# EAGLE board Daughter Card.job (EAGLE 6.5.1)
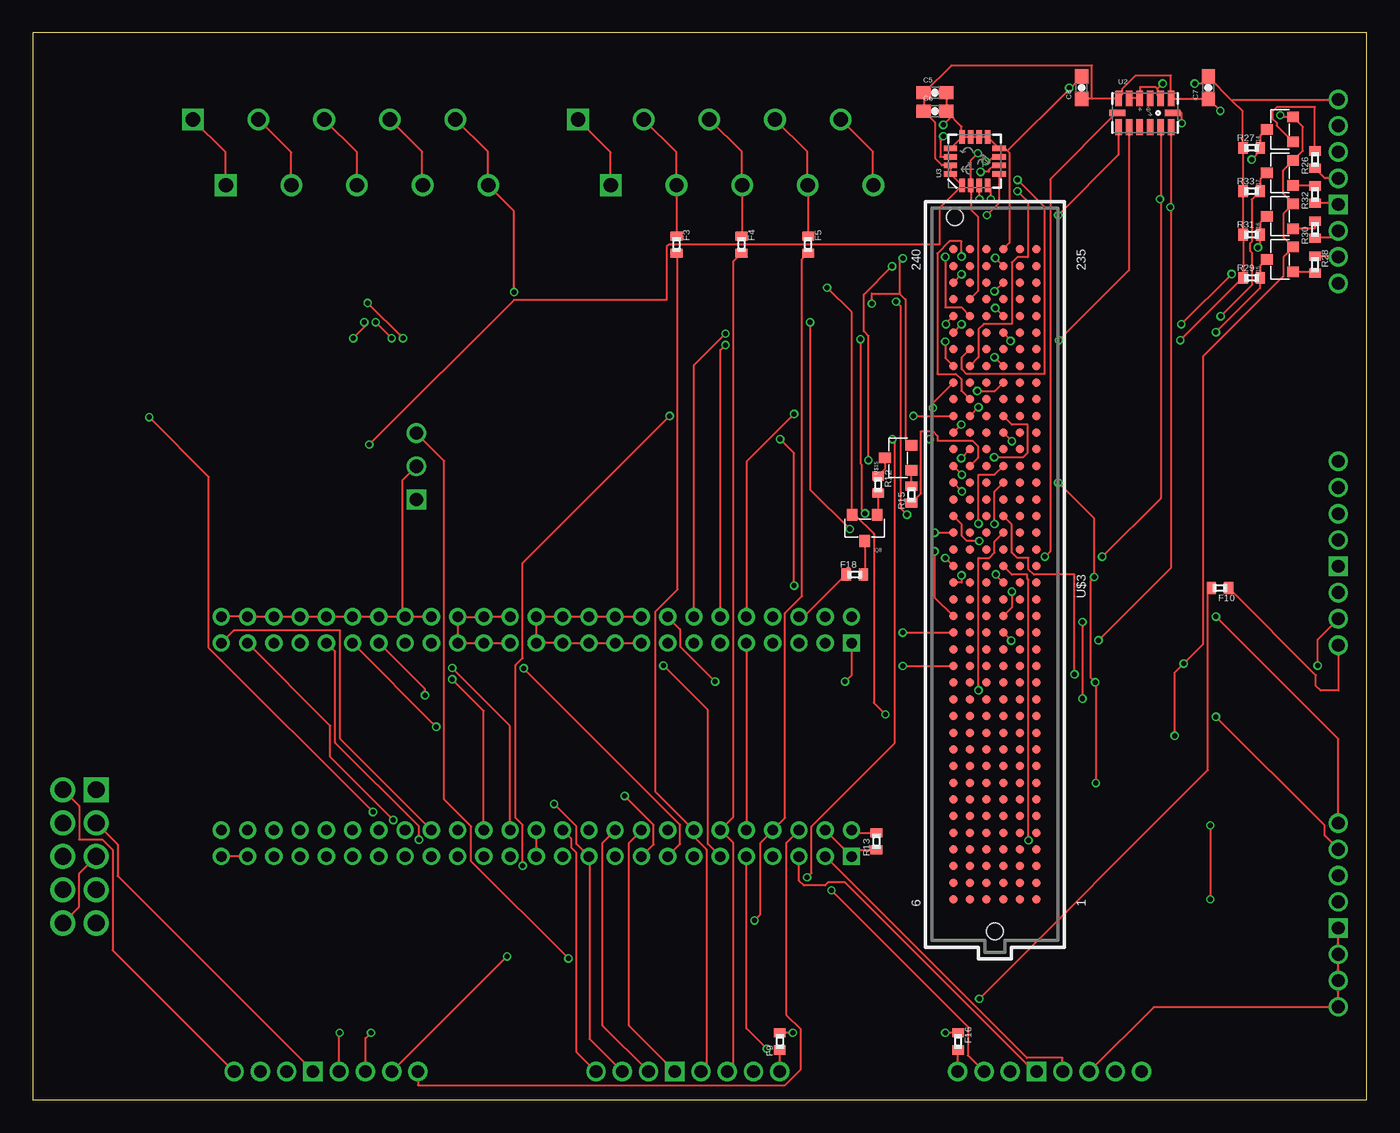
[diagram p0: board, top side]
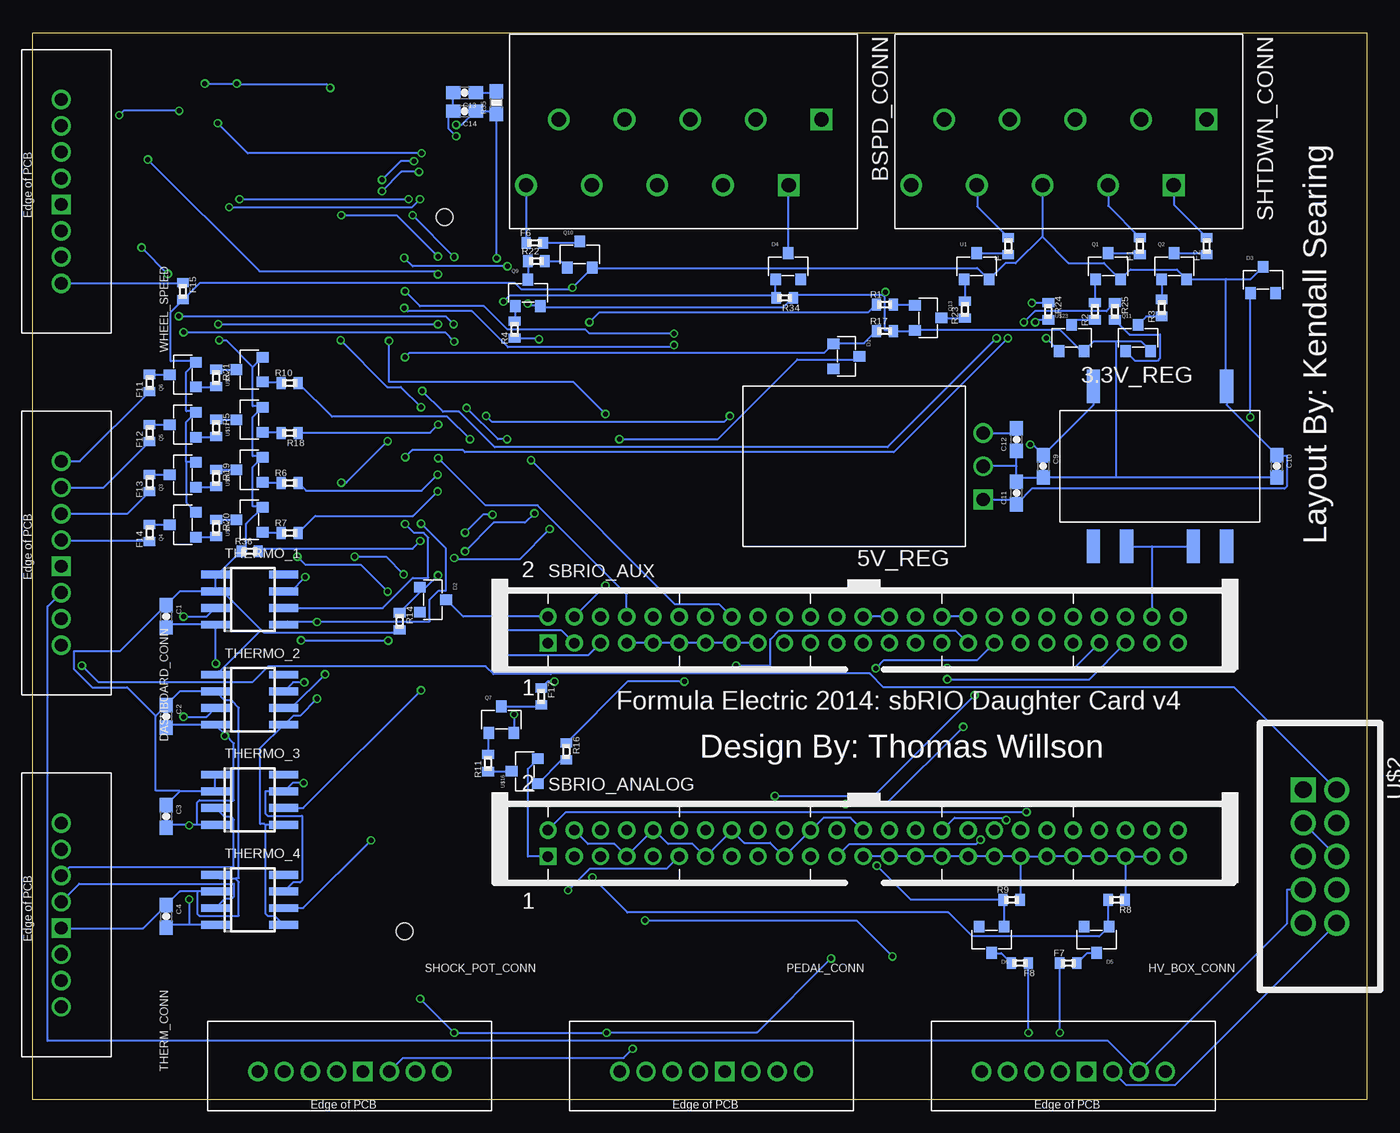
[diagram p1: board, bottom side, seen from below]

Size 101.6 x 81.28 mm. Coordinates in mm from the lower left corner, seen from the top.
Outline: 0,0 101.6,0 101.6,81.28 0,81.28 0,0
Copper layers (1*16): Top 0.035mm / dielectric 1.5mm / Bottom 0.035mm
Design rules "PCBFabExpress DRC *": minimum track width 6mil, minimum drill 15mil, track to track 6mil, track to pad 8mil, pad to pad 8mil, via to via 8mil, smd to smd 8mil, copper to edge 10mil, drill to drill 8mil, minimum pad ring 10mil, minimum via ring 5mil, stop-mask expansion 2mil, vias tented up to drill 100mil, thermal gap 10mil
Net classes: 0 default: clearance 0.205 mm

## Footprints (pad centres in the part's own frame; a part is rotated, then mirrored left to right if it is on the bottom)
V78XX-1000 = smd 1 x 2.54: 1 -5.08,-6.096; 5 5.08,-6.096; 6 5.08,6.096; 7 2.54,6.096; 9 -2.54,6.096; 10 -5.08,6.096
V78XX-1500R = drill 1 square: P$1 0,2.54 | drill 1: P$2 0,0; P$3 0,-2.54
CONNECTOR_5 = drill 1.1 square: 1 0,0; 2 2.5,5 | drill 1.1: 3 5,0; 4 7.5,5; 5 10,0; 6 12.5,5; 7 15,0; 8 17.5,5; 9 20,0; 10 22.5,5
0603-CAP = smd 1.1 x 1: 1 -0.85,0; 2 0.85,0
SOT-23-3 = smd 0.8 x 0.9: P$1 0,1; P$2 -0.95,-1; P$3 0.95,-1
EN3_PCB_8 = drill 0.965 pad 1.397 square: P$1 0,0 | drill 0.965 pad 1.397: P$2 2,0; P$3 4,0; P$4 6,0; P$5 -8,0; P$6 -6,0; P$7 -4,0; P$8 -2,0
R0402 = smd 0.7 x 0.9: 1 -0.65,0; 2 0.65,0
0603-RES = smd 1.1 x 1: 1 -0.85,0; 2 0.85,0
SBRIO_J502_J503 = drill 0.8 square: P$1 0,0 | drill 0.8: P$2 0,2; P$3 2,0; P$4 2,2; P$5 4,0; P$6 4,2; P$7 6,0; P$8 6,2; P$9 8,0; P$10 8,2; P$11 10,0; P$12 10,2; P$13 12,0; P$14 12,2; P$15 14,0; P$16 14,2; P$17 16,0; P$18 16,2; P$19 18,0; P$20 18,2; P$21 20,0; P$22 20,2; P$23 22,0; P$24 22,2; P$25 24,0; P$26 24,2; P$27 26,0; P$28 26,2; P$29 28,0; P$30 28,2; P$31 30,0; P$32 30,2; P$33 32,0; P$34 32,2; P$35 34,0; P$36 34,2; P$37 36,0; P$38 36,2; P$39 38,0; P$40 38,2; P$41 40,0; P$42 40,2; P$43 42,0; P$44 42,2; P$45 44,0; P$46 44,2; P$47 46,0; P$48 46,2; P$49 48,0; P$50 48,2
SO08 = smd 0.6 x 2.2: 1 -1.905,-2.6; 2 -0.635,-2.6; 3 0.635,-2.6; 4 1.905,-2.6; 5 1.905,2.6; 6 0.635,2.6; 7 -0.635,2.6; 8 -1.905,2.6
LGA14 = smd 0.5 x 1.2: 1 2,1.1; 2 1.2,1.1; 3 0.4,1.1; 4 -0.4,1.1; 5 -1.2,1.1; 6 -2,1.1; 8 -2,-1.1; 9 -1.2,-1.1; 10 -0.4,-1.1; 11 0.4,-1.1; 12 1.2,-1.1; 13 2,-1.1 | smd 1.2 x 0.5: 7 -2.1,0; 14 2.1,0
LGA16-4X4 = smd 1 x 0.4: 1 -1.85,0.975; 2 -1.85,0.325; 3 -1.85,-0.325; 4 -1.85,-0.975; 9 1.85,-0.975; 10 1.85,-0.325; 11 1.85,0.325; 12 1.85,0.975 | smd 0.4 x 1: 5 -0.975,-1.85; 6 -0.325,-1.85; 7 0.325,-1.85; 8 0.975,-1.85; 13 0.975,1.85; 14 0.325,1.85; 15 -0.325,1.85; 16 -0.975,1.85
SBRIO_W = drill 1.27 pad 1.778 square: P$1 -5.08,-1.27 | drill 1.27 pad 1.778: P$2 -5.08,1.27; P$3 -2.54,-1.27; P$4 -2.54,1.27; P$5 0,-1.27; P$6 0,1.27; P$7 2.54,-1.27; P$8 2.54,1.27; P$9 5.08,-1.27; P$10 5.08,1.27
SEAM-40-XX.X-XX-06-X-A = smd 0.635 x 0.635: 1 24.765,3.175; 2 24.765,1.905; 3 24.765,0.635; 4 24.765,-0.635; 5 24.765,-1.905; 6 24.765,-3.175; 7 23.495,3.175; 8 23.495,1.905; 9 23.495,0.635; 10 23.495,-0.635; 11 23.495,-1.905; 12 23.495,-3.175; 13 22.225,3.175; 14 22.225,1.905; 15 22.225,0.635; 16 22.225,-0.635; 17 22.225,-1.905; 18 22.225,-3.175; 19 20.955,3.175; 20 20.955,1.905; 21 20.955,0.635; 22 20.955,-0.635; 23 20.955,-1.905; 24 20.955,-3.175; 25 19.685,3.175; 26 19.685,1.905; 27 19.685,0.635; 28 19.685,-0.635; 29 19.685,-1.905; 30 19.685,-3.175; 31 18.415,3.175; 32 18.415,1.905; 33 18.415,0.635; 34 18.415,-0.635; 35 18.415,-1.905; 36 18.415,-3.175; 37 17.145,3.175; 38 17.145,1.905; 39 17.145,0.635; 40 17.145,-0.635; 41 17.145,-1.905; 42 17.145,-3.175; 43 15.875,3.175; 44 15.875,1.905; 45 15.875,0.635; 46 15.875,-0.635; 47 15.875,-1.905; 48 15.875,-3.175; 49 14.605,3.175; 50 14.605,1.905; 51 14.605,0.635; 52 14.605,-0.635; 53 14.605,-1.905; 54 14.605,-3.175; 55 13.335,3.175; 56 13.335,1.905; 57 13.335,0.635; 58 13.335,-0.635; 59 13.335,-1.905; 60 13.335,-3.175; 61 12.065,3.175; 62 12.065,1.905; 63 12.065,0.635; 64 12.065,-0.635; 65 12.065,-1.905; 66 12.065,-3.175; 67 10.795,3.175; 68 10.795,1.905; 69 10.795,0.635; 70 10.795,-0.635; 71 10.795,-1.905; 72 10.795,-3.175; 73 9.525,3.175; 74 9.525,1.905; 75 9.525,0.635; 76 9.525,-0.635; 77 9.525,-1.905; 78 9.525,-3.175; 79 8.255,3.175; 80 8.255,1.905; 81 8.255,0.635; 82 8.255,-0.635; 83 8.255,-1.905; 84 8.255,-3.175; 85 6.985,3.175; 86 6.985,1.905; 87 6.985,0.635; 88 6.985,-0.635; 89 6.985,-1.905; 90 6.985,-3.175; 91 5.715,3.175; 92 5.715,1.905; 93 5.715,0.635; 94 5.715,-0.635; 95 5.715,-1.905; 96 5.715,-3.175; 97 4.445,3.175; 98 4.445,1.905; 99 4.445,0.635; 100 4.445,-0.635; 101 4.445,-1.905; 102 4.445,-3.175; 103 3.175,3.175; 104 3.175,1.905; 105 3.175,0.635; 106 3.175,-0.635; 107 3.175,-1.905; 108 3.175,-3.175; 109 1.905,3.175; 110 1.905,1.905; 111 1.905,0.635; 112 1.905,-0.635; 113 1.905,-1.905; 114 1.905,-3.175; 115 0.635,3.175; 116 0.635,1.905; 117 0.635,0.635; 118 0.635,-0.635; 119 0.635,-1.905; 120 0.635,-3.175; 121 -0.635,3.175; 122 -0.635,1.905; 123 -0.635,0.635; 124 -0.635,-0.635; 125 -0.635,-1.905; 126 -0.635,-3.175; 127 -1.905,3.175; 128 -1.905,1.905; 129 -1.905,0.635; 130 -1.905,-0.635; 131 -1.905,-1.905; 132 -1.905,-3.175; 133 -3.175,3.175; 134 -3.175,1.905; 135 -3.175,0.635; 136 -3.175,-0.635; 137 -3.175,-1.905; 138 -3.175,-3.175; 139 -4.445,3.175; 140 -4.445,1.905; 141 -4.445,0.635; 142 -4.445,-0.635; 143 -4.445,-1.905; 144 -4.445,-3.175; 145 -5.715,3.175; 146 -5.715,1.905; 147 -5.715,0.635; 148 -5.715,-0.635; 149 -5.715,-1.905; 150 -5.715,-3.175; 151 -6.985,3.175; 152 -6.985,1.905; 153 -6.985,0.635; 154 -6.985,-0.635; 155 -6.985,-1.905; 156 -6.985,-3.175; 157 -8.255,3.175; 158 -8.255,1.905; 159 -8.255,0.635; 160 -8.255,-0.635; 161 -8.255,-1.905; 162 -8.255,-3.175; 163 -9.525,3.175; 164 -9.525,1.905; 165 -9.525,0.635; 166 -9.525,-0.635; 167 -9.525,-1.905; 168 -9.525,-3.175; 169 -10.795,3.175; 170 -10.795,1.905; 171 -10.795,0.635; 172 -10.795,-0.635; 173 -10.795,-1.905; 174 -10.795,-3.175; 175 -12.065,3.175; 176 -12.065,1.905; 177 -12.065,0.635; 178 -12.065,-0.635; 179 -12.065,-1.905; 180 -12.065,-3.175; 181 -13.335,3.175; 182 -13.335,1.905; 183 -13.335,0.635; 184 -13.335,-0.635; 185 -13.335,-1.905; 186 -13.335,-3.175; 187 -14.605,3.175; 188 -14.605,1.905; 189 -14.605,0.635; 190 -14.605,-0.635; 191 -14.605,-1.905; 192 -14.605,-3.175; 193 -15.875,3.175; 194 -15.875,1.905; 195 -15.875,0.635; 196 -15.875,-0.635; 197 -15.875,-1.905; 198 -15.875,-3.175; 199 -17.145,3.175; 200 -17.145,1.905; 201 -17.145,0.635; 202 -17.145,-0.635; 203 -17.145,-1.905; 204 -17.145,-3.175; 205 -18.415,3.175; 206 -18.415,1.905; 207 -18.415,0.635; 208 -18.415,-0.635; 209 -18.415,-1.905; 210 -18.415,-3.175; 211 -19.685,3.175; 212 -19.685,1.905; 213 -19.685,0.635; 214 -19.685,-0.635; 215 -19.685,-1.905; 216 -19.685,-3.175; 217 -20.955,3.175; 218 -20.955,1.905; 219 -20.955,0.635; 220 -20.955,-0.635; 221 -20.955,-1.905; 222 -20.955,-3.175; 223 -22.225,3.175; 224 -22.225,1.905; 225 -22.225,0.635; 226 -22.225,-0.635; 227 -22.225,-1.905; 228 -22.225,-3.175; 229 -23.495,3.175; 230 -23.495,1.905; 231 -23.495,0.635; 232 -23.495,-0.635; 233 -23.495,-1.905; 234 -23.495,-3.175; 235 -24.765,3.175; 236 -24.765,1.905; 237 -24.765,0.635; 238 -24.765,-0.635; 239 -24.765,-1.905; 240 -24.765,-3.175 | hole 1.27: 27.191,0; -27.191,-3.048

## Placement (x,y rotation side)
3.3V_REG  V7803-1000  [V78XX-1000]  15.75,48.26 180 bottom
5V_REG  V78XX-1500  [V78XX-1500R]  29.21,48.26 180 bottom
BSPD_CONN  CONN_5  [CONNECTOR_5]  41.53,74.68 180 bottom
C1  .1uF  [0603-CAP]  91.44,36.83 270 bottom
C2  .1uF  [0603-CAP]  91.44,29.21 270 bottom
C3  .1uF  [0603-CAP]  91.44,21.59 270 bottom
C4  .1uF  [0603-CAP]  91.44,13.97 270 bottom
C5  .1uF  [0603-CAP]  68.71,76.71 0 top
C6  10uF  [0603-CAP]  68.71,75.31 0 top
C7  .1uF  [0603-CAP]  89.53,77.09 90 top
C8  1uF  [0603-CAP]  79.88,77.09 90 top
C9  22uF  [0603-CAP]  24.64,48.26 270 bottom
C10  10uF  [0603-CAP]  6.86,48.26 270 bottom
C11  10uF  [0603-CAP]  26.67,46.23 90 bottom
C12  22uF  [0603-CAP]  26.67,50.29 90 bottom
C13  470nF  [0603-CAP]  68.71,76.71 180 bottom
C14  10nF  [0603-CAP]  68.71,75.31 180 bottom
D1  MMBZ5238B-7-F  [SOT-23-3]  39.62,56.64 270 bottom
D2  MMBZ5238B-7-F  [SOT-23-3]  71.12,38.1 270 bottom
D3  MMBZ5238B-7-F  [SOT-23-3]  7.91,62.45 0 bottom
D4  MMBZ5238B-7-F  [SOT-23-3]  44.07,63.5 0 bottom
D5  MMBZ5238B-7-F  [SOT-23-3]  20.57,12.19 180 bottom
D6  MMBZ5238B-7-F  [SOT-23-3]  28.57,12.19 180 bottom
DASHBOARD_CONN  EN3_PCB_8  [EN3_PCB_8]  99.44,40.64 270 bottom
F  [R0402]  27.3,65.02 90 bottom
F1  [R0402]  17.27,65.02 90 bottom
F2  [R0402]  12.19,65.02 90 bottom
F3  [R0402]  49.02,65.15 270 top
F4  [R0402]  53.98,65.15 270 top
F5  [R0402]  59.05,65.15 270 top
F6  [R0402]  63.37,65.28 0 bottom
F7  [R0402]  22.73,10.41 0 bottom
F8  [R0402]  26.42,10.41 180 bottom
F9  [R0402]  56.9,4.45 90 top
F10  [R0402]  90.42,38.99 180 top
F11  [R0402]  92.71,54.61 90 bottom
F12  [R0402]  92.71,50.8 90 bottom
F13  [R0402]  92.71,46.99 90 bottom
F14  [R0402]  92.71,43.18 90 bottom
F15  [R0402]  90.17,61.59 270 bottom
F16  [R0402]  70.48,4.45 270 top
F17  [R0402]  62.87,30.73 270 bottom
F18  [R0402]  62.61,40.01 0 top
HV_BOX_CONN  EN3_PCB_8  [EN3_PCB_8]  21.34,2.16 0 bottom
PEDAL_CONN  EN3_PCB_8  [EN3_PCB_8]  48.9,2.16 0 bottom
Q1  MMBT4403-7-F  [SOT-23-3]  19.68,63.5 0 bottom
Q2  MMBT4403-7-F  [SOT-23-3]  14.66,63.5 0 bottom
Q3  MMBT4403-7-F  [SOT-23-3]  90.17,47.62 90 bottom
Q4  MMBT4403-7-F  [SOT-23-3]  90.17,43.81 90 bottom
Q5  MMBT4403-7-F  [SOT-23-3]  90.17,51.44 90 bottom
Q6  MMBT4403-7-F  [SOT-23-3]  90.17,55.24 90 bottom
Q7  MMBT4403-7-F  [SOT-23-3]  65.91,28.96 0 bottom
Q8  MMBT4403-7-F  [SOT-23-3]  63.37,43.56 180 top
Q9  MMBT4401-7-F  [SOT-23-3]  63.88,61.47 0 bottom
Q10  MMBT4403-7-F  [SOT-23-3]  59.94,64.39 0 bottom
Q11  MMBT4401-7-F  [SOT-23-3]  17.4,58.04 0 bottom
Q13  MMBT4401-7-F  [SOT-23-3]  33.4,59.56 270 bottom
Q14  MMBT4403-7-F  [SOT-23-3]  95,73.91 90 top
Q15  MMBT4403-7-F  [SOT-23-3]  95,64.01 90 top
Q16  MMBT4403-7-F  [SOT-23-3]  95,67.31 90 top
Q17  MMBT4403-7-F  [SOT-23-3]  95,70.61 90 top
R1  5k  [R0402]  36.7,60.58 0 bottom
R2  5k  [R0402]  20.7,60.07 90 bottom
R3  5k  [R0402]  15.62,60.33 90 bottom
R4  4.7k  [R0402]  64.9,58.67 90 bottom
R5  4.7k  [R0402]  87.63,51.18 270 bottom
R6  4.7k  [R0402]  82.04,46.99 0 bottom
R7  4.7k  [R0402]  82.04,43.18 0 bottom
R8  10k  [R0402]  19.05,15.24 180 bottom
R9  10k  [R0402]  27.05,15.24 0 bottom
R10  4.7k  [R0402]  82.04,54.61 0 bottom
R11  4.7k  [R0402]  66.93,25.65 90 bottom
R12  4.7k  [R0402]  64.39,46.86 270 top
R13  10k  [R0402]  64.26,19.68 90 top
R14  10k  [R0402]  73.66,36.45 270 bottom
R15  4.7k  [R0402]  66.93,46.1 90 top
R16  4.7k  [R0402]  60.96,26.54 270 bottom
R17  10k  [R0402]  36.7,58.55 0 bottom
R18  4.7k  [R0402]  82.04,50.8 180 bottom
R19  4.7k  [R0402]  87.63,47.37 270 bottom
R20  4.7k  [R0402]  87.63,43.56 270 bottom
R21  4.7k  [R0402]  87.63,54.99 270 bottom
R22  4.7k  [R0402]  63.25,63.88 0 bottom
R23  5k  [R0402]  30.61,60.2 90 bottom
R24  5k  [R0402]  24.26,60.07 270 bottom
R25  5k  [R0402]  19.18,60.07 270 bottom
R26  10k  [R0402]  97.66,71.63 90 top
R27  1k  [R0402]  92.84,72.52 0 top
R28  10k  [R0402]  97.66,63.63 270 top
R29  1k  [R0402]  92.84,62.61 0 top
R30  10k  [R0402]  97.66,66.29 90 top
R31  1k  [R0402]  92.84,65.91 0 top
R32  10k  [R0402]  97.66,68.96 90 top
R33  1k  [R0402]  92.84,69.22 0 top
R34  10k  [R0402]  44.32,61.09 180 bottom
R35  10K  [0603-RES]  66.29,75.95 90 bottom
R36  10k  [R0402]  85.09,41.78 0 bottom
SBRIO_ANALOG  SBRIO_MIO  [SBRIO_J502_J503]  62.36,18.54 0 bottom
SBRIO_AUX  SBRIO_AUX  [SBRIO_J502_J503]  62.36,34.8 0 bottom
SHOCK_POT_CONN  EN3_PCB_8  [EN3_PCB_8]  76.45,2.16 0 bottom
SHTDWN_CONN  CONN_5  [CONNECTOR_5]  12.19,74.68 180 bottom
THERM_CONN  EN3_PCB_8  [EN3_PCB_8]  99.44,13.08 270 bottom
THERMO_1  MAX6675  [SO08]  85.09,38.1 270 bottom
THERMO_2  MAX6675  [SO08]  85.09,30.48 270 bottom
THERMO_3  MAX6675  [SO08]  85.09,22.86 270 bottom
THERMO_4  MAX6675  [SO08]  85.09,15.24 270 bottom
U1  MMBT4403-7-F  [SOT-23-3]  29.72,63.5 0 bottom
U2  ADXL345  [LGA14]  84.71,75.18 0 top
U3  L3G4200D  [LGA16-4X4]  71.75,71.5 90 top
U$2  SBRIO_W500  [SBRIO_W]  3.56,18.54 270 bottom
U$3  SBRIO_RMC  [SEAM-40-XX.X-XX-06-X-A]  73.28,40.03 270 top
U$15  MMBT4401-7-F  [SOT-23-3]  65.91,48.9 90 top
U$16  MMBT4401-7-F  [SOT-23-3]  64.14,25.02 90 bottom
U$17  MMBT4401-7-F  [SOT-23-3]  85.09,51.82 90 bottom
U$18  MMBT4401-7-F  [SOT-23-3]  85.09,48.01 90 bottom
U$19  MMBT4401-7-F  [SOT-23-3]  85.09,44.2 90 bottom
U$20  MMBT4401-7-F  [SOT-23-3]  85.09,55.63 90 bottom
U$23  MMBT4401-7-F  [SOT-23-3]  22.48,58.04 0 bottom
WHEEL_SPEED  EN3_PCB_8  [EN3_PCB_8]  99.44,68.2 270 bottom

## Library data of the parts
3.3V_REG 5V_REG BSPD_CONN D1-D6 DASHBOARD_CONN HV_BOX_CONN PEDAL_CONN Q1-Q11 Q13-Q17 SBRIO_ANALOG SBRIO_AUX SHOCK_POT_CONN SHTDWN_CONN THERM_CONN U1 U$2 U$15-U$20 U$23 WHEEL_SPEED = formula electric
C1-C14 R35 = SparkFun-Passives
F F1-F18 R1-R34 R36 = resistor
THERMO_1-THERMO_4 = max6675
U2 U3 = SparkFun-Sensors
U$3 = SEAM-40-XX.X-XX-06-X-A

## Nets
3.3V: 3.3V_REG.5 C1.2 C2.2 C3.2 C4.2 C5.1 C6.1 C7.1 C8.1 C9.1 Q14.P$3 Q15.P$3 Q16.P$3 Q17.P$3 THERMO_1.4 THERMO_2.4 THERMO_3.4 THERMO_4.4 U2.1 U2.6 U3.1 U3.15 U3.16
5V: 5V_REG.P$3 C12.2 F9.2 F10.2 F16.1
12V: 3.3V_REG.1 5V_REG.P$1 C10.1 C11.1 D3.P$1 F15.2 Q1.P$3 Q2.P$3 Q3.P$3 Q4.P$3 Q5.P$3 Q6.P$3 Q7.P$3 Q8.P$3 Q10.P$3 SHTDWN_CONN.5 SHTDWN_CONN.6 U1.P$3
AI1: HV_BOX_CONN.P$5 SBRIO_ANALOG.P$6
AI2: F5.2 HV_BOX_CONN.P$6 SBRIO_ANALOG.P$8
AI3: F4.2 PEDAL_CONN.P$7 SBRIO_ANALOG.P$12
AI4: F3.2 PEDAL_CONN.P$8 SBRIO_ANALOG.P$14
AI7: PEDAL_CONN.P$4 SBRIO_ANALOG.P$24
AI8: SBRIO_ANALOG.P$3 SHOCK_POT_CONN.P$8
AI9: SBRIO_ANALOG.P$5 SHOCK_POT_CONN.P$1
AI10: SBRIO_ANALOG.P$9 SHOCK_POT_CONN.P$2
AI11: SBRIO_ANALOG.P$11 SBRIO_AUX.P$33 SHOCK_POT_CONN.P$3
AI12: SBRIO_ANALOG.P$15 SBRIO_AUX.P$35
AI13: SBRIO_ANALOG.P$17 SBRIO_AUX.P$37
AI15: SBRIO_ANALOG.P$23 SBRIO_AUX.P$41
AMS_OK: D6.P$1 F8.2
AMS_OUT: F12.2 Q5.P$1
AO0: SBRIO_ANALOG.P$28 SBRIO_AUX.P$43
AO1: SBRIO_ANALOG.P$30 SBRIO_AUX.P$45
AO2: SBRIO_ANALOG.P$32 SBRIO_AUX.P$47
AO3: SBRIO_ANALOG.P$34 SBRIO_AUX.P$49
BSPD_OUT: F14.2 Q4.P$1
BUZZER_OUT: F11.2 Q6.P$1
CAN_GND: HV_BOX_CONN.P$1 U$2.P$3 U$2.P$6
CAN_H: DASHBOARD_CONN.P$2 HV_BOX_CONN.P$3 U$2.P$7
CAN_L: DASHBOARD_CONN.P$3 HV_BOX_CONN.P$4 U$2.P$2
DI09: DASHBOARD_CONN.P$1
DIO0: Q14.P$1 R27.2 U$3.228
DIO1: Q17.P$1 R33.2 U$3.216
DIO2: Q16.P$1 R31.2 U$3.210
DIO3: Q15.P$1 R29.2 U$3.198
DIO6: R18.1 U$3.174
DIO7: R6.2 U$3.162
DIO8: R7.2 U$3.156
DIO9: R36.2 U$3.144
DIO10: D4.P$2 R34.2 U$3.138
DIO11: R1.1 U$3.126
DIO12: D2.P$2 R14.1 U$3.120
DIO13: R4.1 U$3.108
DIO14: R10.2 SBRIO_AUX.P$3 U$3.102
DIO15: SBRIO_AUX.P$5 U$3.90
DIO16: R16.1 SBRIO_AUX.P$16 U$3.231
DIO17: SBRIO_AUX.P$14 U$3.225
DIO18: SBRIO_AUX.P$12 U$3.213
DIO19: SBRIO_AUX.P$10 U$3.207
DIO20: D1.P$2 R17.1 U$3.195
DIO29: U2.7 U$3.117
DIO30: U2.12 U3.4 U$3.105
DIO31: U2.13 U3.3 U$3.99
DIO32: U2.14 U3.2 U$3.221
DIO33: U3.5 U$3.215
DIO34: U3.7 U$3.203
DIO35: U3.6 U$3.197
DIO36: U2.8 U$3.185
DIO37: U2.9 U$3.179
DIO38: SBRIO_AUX.P$8 U$3.167
DIO39: R15.1 U$3.161
GND: 3.3V_REG.7 3.3V_REG.9 5V_REG.P$2 C1.1 C2.1 C3.1 C4.1 C5.2 C6.2 C7.2 C8.2 C9.2 C10.2 C11.2 C12.1 C14.1 Q9.P$3 Q11.P$3 Q13.P$3 R8.1 R9.2 R13.1 R14.2 R17.2 R27.1 R29.1 R31.1 R33.1 R34.1 R35.1 R36.1 SBRIO_ANALOG.P$1 SBRIO_ANALOG.P$4 SBRIO_ANALOG.P$7 SBRIO_ANALOG.P$10 SBRIO_ANALOG.P$13 SBRIO_ANALOG.P$16 SBRIO_ANALOG.P$19 SBRIO_ANALOG.P$22 SBRIO_ANALOG.P$25 SBRIO_ANALOG.P$26 SBRIO_ANALOG.P$27 SBRIO_ANALOG.P$29 SBRIO_ANALOG.P$31 SBRIO_ANALOG.P$33 SBRIO_ANALOG.P$35 SBRIO_ANALOG.P$37 SBRIO_ANALOG.P$39 SBRIO_ANALOG.P$41 SBRIO_ANALOG.P$43 SBRIO_ANALOG.P$45 SBRIO_ANALOG.P$47 SBRIO_ANALOG.P$49 SBRIO_AUX.P$7 SBRIO_AUX.P$9 SBRIO_AUX.P$11 SBRIO_AUX.P$13 SBRIO_AUX.P$15 SBRIO_AUX.P$17 SBRIO_AUX.P$18 SBRIO_AUX.P$19 SBRIO_AUX.P$20 SBRIO_AUX.P$21 SBRIO_AUX.P$22 SBRIO_AUX.P$23 SBRIO_AUX.P$24 SBRIO_AUX.P$25 SBRIO_AUX.P$26 SBRIO_AUX.P$27 SBRIO_AUX.P$28 SBRIO_AUX.P$29 SBRIO_AUX.P$30 SBRIO_AUX.P$31 SBRIO_AUX.P$32 SBRIO_AUX.P$34 SBRIO_AUX.P$36 SBRIO_AUX.P$38 SBRIO_AUX.P$40 SBRIO_AUX.P$42 SBRIO_AUX.P$44 SBRIO_AUX.P$46 SBRIO_AUX.P$48 SBRIO_AUX.P$50 SHOCK_POT_CONN.P$7 SHTDWN_CONN.9 SHTDWN_CONN.10 THERM_CONN.P$1 THERM_CONN.P$2 THERM_CONN.P$3 THERM_CONN.P$4 THERMO_1.1 THERMO_1.2 THERMO_2.1 THERMO_2.2 THERMO_3.1 THERMO_3.2 THERMO_4.1 THERMO_4.2 U2.2 U2.4 U2.5 U3.8 U3.9 U3.10 U3.11 U3.12 U3.13 U$3.237 U$15.P$3 U$16.P$3 U$17.P$3 U$18.P$3 U$19.P$3 U$20.P$3 U$23.P$3 WHEEL_SPEED.P$5
IMD_OK: D5.P$1 F7.2
IMD_OUT: F13.2 Q3.P$1
N$1: D2.P$1 SBRIO_AUX.P$2
N$2: D1.P$1 SBRIO_AUX.P$4
N$3: R32.1 WHEEL_SPEED.P$1
N$4: D3.P$2 R13.2 SBRIO_ANALOG.P$2
N$5: Q6.P$2 R21.2
N$6: Q16.P$2 R30.2
N$7: F1.1 Q1.P$1
N$8: F2.1 Q2.P$1
N$9: R28.1 WHEEL_SPEED.P$3
N$10: R26.1 WHEEL_SPEED.P$8
N$11: R24.1 U$3.189
N$12: R25.1 U$3.177
N$13: F8.1 HV_BOX_CONN.P$7
N$14: F7.1 HV_BOX_CONN.P$8
N$15: D5.P$2 R8.2 U$3.192
N$16: D6.P$2 R9.1 U$3.180
N$17: THERMO_1.7 THERMO_2.7 THERMO_3.7 THERMO_4.7 U$3.171
N$18: THERMO_1.5 THERMO_2.5 THERMO_3.5 THERMO_4.5 U$3.159
N$20: F16.2 SHOCK_POT_CONN.P$4
N$21: F15.1 WHEEL_SPEED.P$4
N$22: F9.1 PEDAL_CONN.P$5
N$23: DASHBOARD_CONN.P$4 F10.1
N$24: DASHBOARD_CONN.P$5 F11.1
N$25: THERMO_1.6 U$3.153
N$26: THERMO_2.6 U$3.141
N$27: THERMO_3.6 U$3.135
N$28: THERMO_4.6 U$3.123
N$29: THERM_CONN.P$5 THERMO_1.3
N$30: THERM_CONN.P$6 THERMO_2.3
N$31: THERM_CONN.P$7 THERMO_3.3
N$32: THERM_CONN.P$8 THERMO_4.3
N$33: DASHBOARD_CONN.P$6 F12.1
N$34: DASHBOARD_CONN.P$7 F13.1
N$35: DASHBOARD_CONN.P$8 F14.1
N$36: F.2 SHTDWN_CONN.7 SHTDWN_CONN.8
N$37: C13.2 C14.2 U3.14
N$38: C13.1 R35.2
N$39: F1.2 SHTDWN_CONN.3 SHTDWN_CONN.4
N$40: F2.2 SHTDWN_CONN.1 SHTDWN_CONN.2
N$41: BSPD_CONN.9 BSPD_CONN.10 F6.1
N$42: BSPD_CONN.1 BSPD_CONN.2 D4.P$1
N$43: BSPD_CONN.7 BSPD_CONN.8 F5.1
N$44: F.1 U1.P$1
N$45: F6.2 Q10.P$1
N$46: R23.2 U1.P$2
N$47: Q1.P$2 R2.2
N$48: Q2.P$2 R3.2
N$49: Q10.P$2 R22.2
N$50: Q5.P$2 R5.2
N$51: Q3.P$2 R19.2
N$52: BSPD_CONN.5 BSPD_CONN.6 F4.1
N$53: BSPD_CONN.3 BSPD_CONN.4 F3.1
N$54: Q7.P$2 R11.2
N$55: F17.1 SBRIO_AUX.P$1
N$56: F17.2 Q7.P$1
N$57: F18.2 Q8.P$1
N$58: Q8.P$2 R12.2
N$59: F18.1 SBRIO_AUX.P$6
N$60: R15.2 U$15.P$2
N$61: R12.1 U$15.P$1
N$62: R16.2 U$16.P$2
N$63: R11.1 U$16.P$1
N$64: R5.1 U$17.P$1
N$65: R18.2 U$17.P$2
N$66: R19.1 U$18.P$1
N$67: R6.1 U$18.P$2
N$68: Q4.P$2 R20.2
N$69: R20.1 U$19.P$1
N$70: R7.1 U$19.P$2
N$71: R21.1 U$20.P$1
N$72: R10.1 U$20.P$2
N$73: Q9.P$1 R22.1
N$74: Q9.P$2 R4.2
N$75: Q13.P$1 R23.1
N$76: Q13.P$2 R1.2
N$77: R2.1 U$23.P$1
N$78: Q11.P$1 R3.1
N$79: R24.2 U$23.P$2
N$80: Q11.P$2 R25.2
N$81: Q14.P$2 R26.2
N$82: Q15.P$2 R28.2
N$83: R30.1 WHEEL_SPEED.P$2
N$84: Q17.P$2 R32.2
SHIELD: HV_BOX_CONN.P$2 U$2.P$5 U$2.P$10
STEERING_POS: PEDAL_CONN.P$3 SBRIO_ANALOG.P$21 SBRIO_AUX.P$39
THROTTLE_1: PEDAL_CONN.P$1 SBRIO_ANALOG.P$18
THROTTLE_2: PEDAL_CONN.P$2 SBRIO_ANALOG.P$20
VCC: U$3.236

## Tracks (layer width: path | path; a pad name or v marks a point on that pad's centre or on a via)
3.3V  (via drill 0.38)
  Top 0.152: v89.69,20.9 v89.69,15.27 | v86.97,27.74 86.97,32.54 v87.66,33.22 89.13,34.7 89.13,56.62 95.25,62.74 95.25,64.19 95.96,64.9 Q15.P$3 95.99,64.97 95.25,65.71 95.25,67.51 95.99,68.25 Q16.P$3 95.96,68.33 95.25,69.04 95.25,70.81 95.99,71.55 Q17.P$3 96.06,71.6 96.75,72.29 96.75,74.12 96.01,74.85 Q14.P$3 95.94,74.91 95.02,74.91 v95.02,75.01 | 80.67,76.25 82.7,76.25 U2.6 82.73,76.35 82.96,76.58 82.96,76.99 84,78.03 86.69,78.03 86.69,76.35 U2.1 86.72,76.25 89.53,76.25 C7.1 89.59,76.2 v90.45,75.34 | 80.67,76.25 79.88,76.25 C8.1 | 80.67,76.25 80.67,78.79 69.95,78.79 67.92,76.76 C5.1 C6.1 67.92,75.26 68.73,74.45 68.73,71.7 69.24,71.2 69.83,71.2 U3.15 U3.16 69.95,70.48 70.76,69.67 U3.1 70.74,69.6 69.06,67.92 69.06,65.15 48.46,65.15 48.28,64.97 48.28,60.94 36.65,60.94 v25.63,49.91
  Bottom 0.152: C1.2 91.44,35.99 91.24,36.2 THERMO_1.4 87.66,36.14 v87.66,33.22 | C2.2 91.44,28.37 91.24,28.57 THERMO_2.4 87.66,28.52 86.92,27.79 | THERMO_4.4 89.69,13.34 | 89.69,13.34 91.24,13.34 91.44,13.13 C4.2 | THERMO_3.4 89.08,20.95 | 89.08,20.95 89.69,20.95 | 89.69,20.95 91.24,20.95 91.44,20.75 C3.2 | v89.69,15.27 89.69,13.34 | v89.69,20.9 89.69,20.95 | 86.92,27.79 86.28,27.15 86.28,22.81 88.92,22.81 89.08,22.66 89.08,20.95 | v86.97,27.74 86.92,27.79 | 3.3V_REG.5 20.83,52.93 24.64,49.12 C9.1 24.69,49.17 25.43,49.91 v25.63,49.91 | v95.02,75.01 94.69,75.34 v90.45,75.34
5V  (via drill 0.38)
  Top 0.152: v57.89,5.11 F9.2 | v69.49,5.11 F16.1 | v72.08,7.7 89.51,25.12 89.51,38.73 F10.2 | 5V_REG.P$3 31.34,48.67 31.34,22.89 33.4,20.83 33.4,18.16 v40.79,10.77
  Bottom 0.152: 5V_REG.P$3 27,50.8 C12.2 | v72.08,7.7 v69.49,5.11 v57.89,5.11 57.84,5.16 46.41,5.16 v40.79,10.77
12V  (via drill 0.38)
  Top 0.152: SHTDWN_CONN.5 24.69,72.19 24.69,69.7 SHTDWN_CONN.6 | v64.95,29.36 64.06,30.25 64.06,43.13 62.64,44.55 62.43,44.55 Q8.P$3 62.38,44.63 62.38,59.99 v60.5,61.87
  Bottom 0.152: 10.72,62.53 13.64,62.53 Q2.P$3 14.45,63.25 17.98,63.25 Q1.P$3 18.8,62.53 20.02,63.75 22.71,63.75 24.71,65.76 | 10.72,62.53 8.84,62.53 7.92,63.45 D3.P$1 | 24.71,65.76 26.75,63.73 27.53,63.73 28.75,62.51 U1.P$3 28.83,62.53 29.67,63.37 58.93,63.37 Q10.P$3 59,63.37 v60.5,61.87 60.66,61.72 64.39,61.72 64.87,62.2 88.9,62.2 90.12,60.98 F15.2 90.17,60.94 91.08,60.02 91.08,56.26 89.2,56.26 Q6.P$3 89.18,56.19 89.92,55.45 89.92,52.45 89.2,52.45 Q5.P$3 89.18,52.38 89.92,51.64 89.92,48.56 | 24.71,65.76 24.71,69.67 SHTDWN_CONN.6 | 5V_REG.P$1 27,45.72 C11.1 26.62,45.44 25.5,46.56 6.25,46.56 6.07,46.74 6.07,49.07 6.81,49.07 C10.1 6.86,49.12 10.67,52.93 3.3V_REG.1 10.72,54.41 10.72,62.53 | 89.92,48.56 89.92,45.52 Q4.P$3 | 89.92,48.56 89.18,48.56 Q3.P$3 | v64.95,29.36 64.95,27.96 Q7.P$3
AI1
  Top 0.152: SBRIO_ANALOG.P$6 58.34,20.52 57.4,19.58 57.4,6.45 58.5,5.36 58.5,2.31 57.3,1.12 29.34,1.12 HV_BOX_CONN.P$5
AI2  (via drill 0.38)
  Top 0.152: F5.2 58.6,64.03 58.6,38.38 57.3,37.08 57.3,21.49 SBRIO_ANALOG.P$8 56.34,20.47 55.4,19.53 55.4,14.1 v54.97,13.66 | v36.12,10.92 27.36,2.16 HV_BOX_CONN.P$6
  Bottom 0.152: v36.12,10.92 38.86,13.66 v54.97,13.66
AI3
  Top 0.152: F4.2 53.37,63.88 53.37,21.54 52.38,20.55 SBRIO_ANALOG.P$12 52.43,20.5 53.31,19.61 53.31,2.56 PEDAL_CONN.P$7
AI4
  Top 0.152: F3.2 49.12,64.39 49.12,38.89 47.42,37.19 47.42,23.47 50.34,20.55 SBRIO_ANALOG.P$14 50.37,20.47 50.37,20.02 51.31,19.07 51.31,2.56 PEDAL_CONN.P$8
AI7
  Top 0.152: SBRIO_ANALOG.P$24 40.36,20.52 41.02,19.86 41.02,19.2 41.4,18.82 41.4,3.63 42.88,2.16 PEDAL_CONN.P$4
AI8
  Top 0.152: SBRIO_ANALOG.P$3 60.38,18.54 75.72,3.2 78.44,3.2 78.44,2.16 SHOCK_POT_CONN.P$8
AI9
  Top 0.152: SHOCK_POT_CONN.P$1 76.25,2.16 61.85,16.56 60.58,16.56 60.35,16.33 58.73,16.33 58.37,16.69 SBRIO_ANALOG.P$5
AI10  (via drill 0.38)
  Top 0.152: v55.91,3.89 54.36,5.44 SBRIO_ANALOG.P$9
  Bottom 0.152: v55.91,3.89 56.59,3.2 73.41,3.2 SHOCK_POT_CONN.P$2
AI11  (via drill 0.38)
  Top 0.152: v48.03,33.07 51.41,29.69 51.41,19.48 52.35,18.54 SBRIO_ANALOG.P$11 | v60.83,15.95 71.22,5.56 71.22,3.38 SHOCK_POT_CONN.P$3
  Bottom 0.152: v48.03,33.07 45.41,33.07 45.41,35.08 44.76,35.74 31.32,35.74 30.38,34.8 SBRIO_AUX.P$33 | v60.83,15.95 59.18,17.6 53.31,17.6 52.38,18.54 SBRIO_ANALOG.P$11
AI12  (via drill 0.38)
  Top 0.152: v37.39,32.87 49.3,20.95 49.3,19.48 SBRIO_ANALOG.P$15
  Bottom 0.152: v37.39,32.87 36.75,33.5 29.67,33.5 28.37,34.8 SBRIO_AUX.P$35
AI13  (via drill 0.38)
  Top 0.152: v29.87,30.81 29.87,31.29 SBRIO_AUX.P$37 | v45.09,23.14 47.3,20.93 47.3,19.46 46.38,18.54 SBRIO_ANALOG.P$17
  Bottom 0.152: v29.87,30.81 37.54,23.14 v45.09,23.14
AI15  (via drill 0.38)
  Top 0.152: v29.41,19.81 29.41,20.83 23.04,27.2 23.04,34.14 22.38,34.8 SBRIO_AUX.P$41
  Bottom 0.152: v29.41,19.81 29.74,19.48 39.4,19.48 40.34,18.54 SBRIO_ANALOG.P$23
AMS_OK
  Bottom 0.152: F8.2 27.84,11.18 28.57,11.18 D6.P$1
AMS_OUT
  Bottom 0.152: Q5.P$1 92.71,51.44 F12.2
AO0  (via drill 0.38)
  Top 0.152: v31.95,32.89 36.35,28.5 36.35,20.55 SBRIO_ANALOG.P$28
  Bottom 0.152: v31.95,32.89 22.28,32.89 SBRIO_AUX.P$43
AO1  (via drill 0.38)
  Top 0.152: v31.95,32.03 34.34,29.64 34.34,20.55 SBRIO_ANALOG.P$30
  Bottom 0.152: v31.95,32.03 21.13,32.03 SBRIO_AUX.P$45
AO2  (via drill 0.38)
  Top 0.152: v27.46,21.31 22.66,26.11 22.66,28.5 SBRIO_AUX.P$47
  Bottom 0.152: v27.46,21.31 27.64,21.49 31.39,21.49 32.33,20.55 SBRIO_ANALOG.P$32
AO3
  Top 0.152: SBRIO_AUX.P$49 14.38,34.8 15.32,35.74 23.42,35.74 23.42,27.48 SBRIO_ANALOG.P$34
BSPD_OUT
  Bottom 0.152: Q4.P$1 92.71,43.81 F14.2
BUZZER_OUT
  Bottom 0.152: Q6.P$1 92.71,55.24 F11.2
CAN_GND
  Top 0.152: HV_BOX_CONN.P$1 6.45,17.04 6.45,19.46 U$2.P$3
  Bottom 0.152: U$2.P$3 U$2.P$6
CAN_H
  Bottom 0.152: U$2.P$7 6.07,16 6.07,13.41 17.32,2.16 HV_BOX_CONN.P$3 17.4,2.18 19.71,4.5 100.48,4.5 100.48,37.59 DASHBOARD_CONN.P$2
CAN_L  (via drill 0.38)
  Top 0.152: U$2.P$2 3.53,22.38 3.53,19.84 5.28,19.84 6.07,19.05 6.07,11.4 15.32,2.16 HV_BOX_CONN.P$4 | v97.87,33.07 97.87,35.05 99.44,36.63 DASHBOARD_CONN.P$3
  Bottom 0.152: v97.87,33.07 96.6,31.8 84.89,31.8 83.67,33.02 67.11,33.02 66.52,32.44 62.15,32.44 62.13,32.46 37.85,32.46 36.8,31.42 10.08,31.42 U$2.P$2
DIO0  (via drill 0.38)
  Top 0.152: v70.74,62.89 U$3.228 | v92.84,71.63 93.47,72.26 93.47,72.52 R27.2 93.52,72.57 93.52,73.46 93.98,73.91 Q14.P$1
  Bottom 0.152: v70.74,62.89 70.97,63.12 84.33,63.12 v92.84,71.63
DIO1  (via drill 0.38)
  Top 0.152: U$3.216 69.55,59.16 v69.55,59.08 | v90.47,59.69 92.84,62.05 92.84,64.54 92.71,64.67 92.71,65.23 92.84,65.35 92.84,68.58 93.47,69.22 R33.2 93.52,69.27 93.52,70.16 93.98,70.61 Q17.P$1
  Bottom 0.152: v69.55,59.08 70.16,59.69 v90.47,59.69
DIO2  (via drill 0.38)
  Top 0.152: v70.74,59.08 U$3.210 | v91.31,62.92 v87.48,59.08 | v93.32,64.92 93.47,65.08 93.47,65.91 R31.2 93.52,65.96 93.52,66.85 93.98,67.31 Q16.P$1
  Bottom 0.152: v87.48,59.08 v70.74,59.08 | v93.32,64.92 v91.31,62.92
DIO3  (via drill 0.38)
  Top 0.152: U$3.198 69.49,56.52 v69.49,57.76 | v90.12,58.47 93.47,61.82 93.47,62.61 R29.2 93.52,62.66 93.52,63.55 93.98,64.01 Q15.P$1
  Bottom 0.152: v69.49,57.76 70.21,58.47 v90.12,58.47
DIO6  (via drill 0.38)
  Top 0.152: v70.71,51.44 U$3.174
  Bottom 0.152: v70.71,51.44 71.32,50.83 81.36,50.83 R18.1
DIO7  (via drill 0.38)
  Top 0.152: v70.76,47.62 U$3.162
  Bottom 0.152: v70.76,47.62 71.98,46.41 80.8,46.41 R6.2
DIO8  (via drill 0.38)
  Top 0.152: v70.76,46.35 U$3.156
  Bottom 0.152: v70.76,46.35 72.64,44.48 80.09,44.48 R7.2
DIO9  (via drill 0.38)
  Top 0.152: U$3.144 70.76,43.81 70.76,42.95 71.14,42.57 v72.08,42.57
  Bottom 0.152: v72.08,42.57 72.67,41.99 84.23,41.99 R36.2
DIO10  (via drill 0.38)
  Top 0.152: v68.68,43.2 U$3.138 | v66.6,44.58 66.09,45.09 66.09,60.48 v65.76,60.81
  Bottom 0.152: v68.68,43.2 67.31,44.58 v66.6,44.58 | v65.76,60.81 65.3,61.27 45.16,61.27 44.98,61.09 R34.2 45.11,61.32 45.03,61.32 45.03,62.48 D4.P$2
DIO11  (via drill 0.38)
  Top 0.152: v69.49,41.27 U$3.126 | v62.23,43.48 59.21,46.51 v59.21,59.23
  Bottom 0.152: v69.49,41.27 69.39,41.17 64.54,41.17 v62.23,43.48 | v59.21,59.23 58.47,59.97 37.97,59.97 37.36,60.58 R1.1
DIO12  (via drill 0.38)
  Top 0.152: U$3.120 70.74,39.4 v70.74,39.95
  Bottom 0.152: v70.74,39.95 71.63,39.06 72.11,39.06 D2.P$2 71.75,39.01 R14.1
DIO13  (via drill 0.38)
  Top 0.152: U$3.108 68.68,38.28 v68.68,41.78 | v63.4,44.68 63.12,44.96 63.12,48.39 63.04,48.46 v63.04,57.94
  Bottom 0.152: v68.68,41.78 66.5,43.97 64.11,43.97 v63.4,44.68 | v63.04,57.94 63.12,58.01 R4.1
DIO14  (via drill 0.38)
  Top 0.152: v66.27,35.59 68.07,35.59 | 68.07,35.59 U$3.102 | v68.3,50.32 68.07,50.09 68.07,35.59
  Bottom 0.152: v66.27,35.59 66.12,35.74 61.32,35.74 60.38,34.8 SBRIO_AUX.P$3 | v68.3,50.32 70.03,52.05 78.82,52.05 R10.2
DIO15  (via drill 0.38)
  Top 0.152: v66.27,33.05 U$3.90
  Bottom 0.152: v66.27,33.05 65.46,33.86 59.31,33.86 SBRIO_AUX.P$5
DIO16  (via drill 0.38)
  Top 0.152: v73.3,64.14 U$3.231 | v65.46,63.5 63.3,61.34 63.3,58.55 63.65,58.19 v63.65,48.72 | v51.97,31.85 49.3,34.52 49.3,35.84 48.36,36.78 SBRIO_AUX.P$16
  Bottom 0.152: v73.3,64.14 72.67,63.5 v65.46,63.5 | v63.65,48.72 52.68,37.74 49.3,37.74 SBRIO_AUX.P$16 | v51.97,31.85 56.31,31.85 60.96,27.2 R16.1
DIO17  (via drill 0.38)
  Top 0.152: v73.25,61.59 U$3.225 | v52.76,58.37 50.37,55.98 SBRIO_AUX.P$14
  Bottom 0.152: v73.25,61.59 72.11,60.45 67.23,60.45 65.46,58.67 59.51,58.67 59.21,58.37 v52.76,58.37
DIO18  (via drill 0.38)
  Top 0.152: v73.3,60.33 U$3.213 | v52.76,57.51 52.38,57.12 52.38,36.8 SBRIO_AUX.P$12
  Bottom 0.152: v73.3,60.33 73.05,60.07 68.15,60.07 65.41,57.33 52.93,57.33 v52.76,57.51
DIO19  (via drill 0.38)
  Top 0.152: U$3.207 74.47,57.89 v74.47,57.81 | v57.99,52.25 54.38,48.64 54.38,36.8 SBRIO_AUX.P$10
  Bottom 0.152: v74.47,57.81 74.47,54.69 60.43,54.69 v57.99,52.25
DIO20  (via drill 0.38)
  Top 0.152: v73.25,56.57 U$3.195
  Bottom 0.152: v73.25,56.57 72.92,56.9 41.33,56.9 40.64,57.58 D1.P$2 40.56,57.63 38.28,57.63 37.36,58.55 R17.1
DIO29  (via drill 0.38)
  Top 0.152: U$3.117 73.36,39.95 v73.36,40.03 | v77.09,41.38 77.5,41.78 77.5,70.13 82.55,75.18 U2.7
  Bottom 0.152: v73.36,40.03 74.7,41.38 v77.09,41.38
DIO30  (via drill 0.38)
  Top 0.152: U$3.105 74.57,37.52 v74.57,38.71 | v81.46,41.38 85.9,45.82 85.9,68.61 | 85.9,68.61 85.9,74.07 U2.12 | v72.97,68.61 72.97,69.42 72.75,69.65 U3.4 | v85.85,68.61 85.9,68.61
  Bottom 0.152: v74.57,38.71 76.63,40.77 80.85,40.77 v81.46,41.38 | v85.85,68.61 v72.97,68.61
DIO31  (via drill 0.38)
  Top 0.152: v74.52,34.98 U$3.99 | v81.18,35 86.69,40.51 86.69,68 | 86.69,68 86.69,74.07 U2.13 | v72.11,68.61 72.11,69.62 U3.3 | v86.64,68 86.69,68
  Bottom 0.152: v74.52,34.98 74.55,35 v81.18,35 | v72.11,68.61 72.72,68 v86.64,68
DIO32  (via drill 0.38)
  Top 0.152: U$3.221 71.98,61.59 71.98,67.28 71.45,67.82 71.45,69.65 U3.2 71.45,69.72 71.45,71.58 v71.98,72.11 | U2.14 87.5,75.18 v87.5,74.4
  Bottom 0.152: v87.5,74.4 85.22,72.11 v71.98,72.11
DIO33  (via drill 0.38)
  Top 0.152: U$3.215 70.71,60.38 69.49,60.38 v69.49,64.21 | v72.67,67.39 73.58,68.3 73.58,70.51 U3.5
  Bottom 0.152: v72.67,67.39 v69.49,64.21
DIO34  (via drill 0.38)
  Top 0.152: U$3.203 70.76,56.57 70.76,55.65 71.12,55.3 77.06,55.3 77.06,68.02 v75.01,70.08 | v72.57,71.5 72.82,71.5 73.13,71.81 73.58,71.81 U3.7
  Bottom 0.152: v75.01,70.08 73.58,71.5 v72.57,71.5
DIO35  (via drill 0.38)
  Top 0.152: U$3.197 72.03,56.57 72.03,58.7 72.44,59.11 74.57,59.11 74.57,63.78 74.98,64.19 75.79,64.19 75.79,68.43 v75.01,69.22 | v72.19,70.69 72.82,70.69 72.82,70.84 73.15,71.17 73.58,71.17 U3.6
  Bottom 0.152: v75.01,69.22 73.53,70.69 v72.19,70.69
DIO36  (via drill 0.38)
  Top 0.152: U$3.185 70.71,54.03 70.71,54.89 70.31,55.3 68.89,55.3 68.89,64.47 69.83,65.41 70.74,65.41 v70.74,64.24 | v78.11,67.39 82.7,71.98 82.7,74.07 U2.8
  Bottom 0.152: v70.74,64.24 73.89,67.39 v78.11,67.39
DIO37  (via drill 0.38)
  Top 0.152: v72.03,52.76 U$3.179 | v78.16,57.86 83.49,63.2 83.49,74.07 U2.9
  Bottom 0.152: v72.03,52.76 73.58,54.3 74.6,54.3 v78.16,57.86
DIO38  (via drill 0.38)
  Top 0.152: U$3.167 70.71,48.9 v70.71,48.87
  Bottom 0.152: v70.71,48.87 67.13,45.29 63.14,45.29 56.36,38.51 SBRIO_AUX.P$8
DIO39
  Top 0.152: U$3.161 71.98,48.9 71.98,49.81 71.58,50.22 68.91,50.22 68.91,50.57 68.56,50.93 67.67,50.93 67.67,46.2 66.93,45.47 R15.1
GND  (via drill 0.38)
  Top 0.152: SHOCK_POT_CONN.P$7 80.47,2.16 85.37,7.06 99.44,7.06 THERM_CONN.P$4 THERM_CONN.P$3 THERM_CONN.P$2 THERM_CONN.P$1 | C6.2 C5.2 | U3.13 69.93,72.49 70.76,73.33 U3.12 | U3.12 70.84,73.36 U3.11 71.5,73.36 72.06,73.36 U3.10 72.14,73.36 U3.9 72.77,73.3 73.56,72.52 U3.8 73.61,72.47 74.07,72.47 74.24,72.29 | C6.2 69.62,75.26 70.74,74.14 70.74,73.41 U3.12 | v69.34,74.27 69.93,74.85 C6.2 | U$3.237 74.4,65.28 74.4,72.14 74.24,72.29 | 74.24,72.29 78.99,77.04 | 78.99,77.04 79.88,77.93 C8.2 | U2.5 83.52,76.3 84.3,76.3 U2.4 84.35,76.35 84.35,77.17 85.5,77.17 85.65,77.01 | 85.65,77.01 85.65,76.56 85.9,76.3 U2.2 | 91.34,76.12 92.15,75.31 92.15,72.57 R27.1 92.2,72.52 92.2,69.27 R33.1 92.2,69.22 92.2,65.96 R31.1 92.2,65.91 92.2,62.61 R29.1 92.13,62.59 v87.4,57.86 | 91.34,76.12 89.53,77.93 C7.2 89.48,77.88 89.48,77.42 v88.49,77.42 | v86.06,77.42 85.65,77.01 | WHEEL_SPEED.P$5 99.44,76.17 91.39,76.17 91.34,76.12 | v78.94,77.09 78.99,77.04 | SHTDWN_CONN.9 32.21,74.68 34.67,72.21 34.67,69.7 SHTDWN_CONN.10 34.72,69.62 36.65,67.69 v36.65,61.54 | 66.02,61.42 66.47,60.96 66.47,50.29 U$15.P$3 | 66.02,61.42 63.91,61.42 v63.91,60.66 | R13.1 64.26,19.02 62.36,19.02 SBRIO_ANALOG.P$1 SBRIO_ANALOG.P$4 | SBRIO_ANALOG.P$47 SBRIO_ANALOG.P$49 | SBRIO_ANALOG.P$26 38.35,20.52 SBRIO_ANALOG.P$25 | SBRIO_AUX.P$17 SBRIO_AUX.P$19 SBRIO_AUX.P$21 SBRIO_AUX.P$23 SBRIO_AUX.P$25 38.35,34.85 38.35,36.78 SBRIO_AUX.P$26 38.43,36.8 40.34,36.8 SBRIO_AUX.P$24 40.44,36.8 42.34,36.8 SBRIO_AUX.P$22 42.42,36.8 44.35,36.8 SBRIO_AUX.P$20 44.42,36.8 SBRIO_AUX.P$18 | SBRIO_AUX.P$27 SBRIO_AUX.P$29 SBRIO_AUX.P$31 32.36,36.78 SBRIO_AUX.P$32 32.44,36.78 34.34,36.78 SBRIO_AUX.P$30 34.42,36.8 36.35,36.8 SBRIO_AUX.P$28
  Top 0.152: SBRIO_AUX.P$50 14.38,36.8 16.33,36.8 SBRIO_AUX.P$48 16.43,36.8 18.34,36.8 SBRIO_AUX.P$46 18.41,36.8 20.34,36.8 SBRIO_AUX.P$44 20.42,36.8 SBRIO_AUX.P$42 22.43,36.8 24.33,36.8 SBRIO_AUX.P$40 24.43,36.8 26.34,36.8 SBRIO_AUX.P$38 26.42,36.8 28.35,36.8 SBRIO_AUX.P$36 | SBRIO_AUX.P$34 28.42,36.8 SBRIO_AUX.P$36 | 5V_REG.P$2 28.17,47.22 28.17,36.85 SBRIO_AUX.P$36 | SBRIO_ANALOG.P$10 SBRIO_AUX.P$9 | v66.27,64.11 66.06,63.91 66.06,61.47 66.02,61.42
  Bottom 0.152: 90.4,23.5 91.44,22.45 C3.1 | 90.4,23.5 THERMO_3.2 87.71,23.55 87.71,24.77 THERMO_3.1 | 92.23,29.23 91.47,30 C2.1 91.44,30.07 90.4,31.11 THERMO_2.2 87.63,31.09 86.97,30.43 86.46,30.43 85.9,29.87 85.9,16.89 86.11,16.89 86.16,16.84 | 92.23,29.23 92.23,23.55 90.45,23.55 90.4,23.5 | THERMO_4.2 89.08,15.88 | 89.08,15.88 90.4,15.88 91.44,14.83 C4.1 91.49,14.78 93.19,13.08 THERM_CONN.P$1 | 86.16,16.84 87.38,16.84 THERMO_4.1 | 86.16,16.84 85.9,16.59 85.9,14.02 88.92,14.02 89.08,14.17 89.08,15.88 | 84.84,55.83 84.1,56.57 U$20.P$3 | 84.84,55.83 84.84,52.83 84.12,52.83 U$17.P$3 84.1,52.76 84.84,52.02 84.84,49.02 84.12,49.02 U$18.P$3 84.1,48.95 84.84,48.21 84.84,45.21 84.12,45.21 U$19.P$3 84.1,45.14 85.34,43.89 85.34,41.83 85.7,41.83 R36.1 87.53,40.01 THERMO_1.1 87.68,39.95 87.68,38.81 THERMO_1.2 | 84.2,35.79 87.15,38.73 THERMO_1.2 | 84.2,35.79 84.02,35.61 73.84,35.61 R14.2 | THERMO_1.2 87.76,38.71 90.42,38.71 91.44,37.69 C1.1 91.49,37.64 94.97,34.16 98.48,34.16 98.48,32.82 97.08,31.42 94.41,31.42 92.23,29.23 | 84.2,35.79 87.38,32.61 87.45,32.61 THERMO_2.1 | v69.34,74.27 68.94,74.27 67.92,75.29 C14.1 66.5,75.31 R35.1 66.27,75.03 v66.27,64.11 | v88.49,77.42 v86.06,77.42 86,77.37 79.22,77.37 v78.94,77.09 | 84.84,55.83 86.87,57.86 v87.4,57.86 | 36.88,61.32 43.43,61.32 R34.1 43.74,61.06 44.45,60.35 62.81,60.35 62.92,60.45 Q9.P$3 62.99,60.5 63.75,60.5 v63.91,60.66 | 36.88,61.32 36.7,61.14 36.7,58.6 36.09,58.6 R17.2 34.47,58.55 34.42,58.6 Q13.P$3 34.34,58.62 23.32,58.62 21.77,57.07 21.59,57.07 U$23.P$3 21.51,57.05 20.78,57.78 19.05,57.78 | 36.88,61.32 v36.65,61.54
  Bottom 0.152: SBRIO_ANALOG.P$1 63.88,18.54 63.88,25.22 63.14,25.96 U$16.P$3 | SBRIO_ANALOG.P$4 60.35,20.52 59.31,19.48 57.3,19.48 56.41,18.59 SBRIO_ANALOG.P$7 54.38,20.52 SBRIO_ANALOG.P$10 54.28,20.55 53.21,19.48 51.33,19.48 50.42,18.57 SBRIO_ANALOG.P$13 50.34,18.54 48.36,20.52 SBRIO_ANALOG.P$16 48.31,20.47 47.42,19.58 45.44,19.58 44.42,18.57 SBRIO_ANALOG.P$19 44.35,18.54 42.37,20.52 SBRIO_ANALOG.P$22 42.29,20.57 41.38,21.49 39.32,21.49 38.38,20.55 SBRIO_ANALOG.P$26 | SBRIO_ANALOG.P$45 18.39,18.54 R8.1 | SBRIO_ANALOG.P$45 SBRIO_ANALOG.P$43 SBRIO_ANALOG.P$41 SBRIO_ANALOG.P$39 SBRIO_ANALOG.P$37 | SBRIO_ANALOG.P$45 SBRIO_ANALOG.P$47 | SBRIO_ANALOG.P$37 26.39,18.54 R9.2 | SBRIO_ANALOG.P$37 SBRIO_ANALOG.P$35 SBRIO_ANALOG.P$33 SBRIO_ANALOG.P$31 SBRIO_ANALOG.P$29 SBRIO_ANALOG.P$27 SBRIO_ANALOG.P$25 | 19.05,57.78 17.2,57.78 Q11.P$3 | 19.05,47.42 24.64,47.42 C9.2 24.69,47.37 26.39,47.37 26.67,47.09 C11.2 26.44,47.42 26.67,47.42 26.67,48.26 | 19.05,47.42 6.86,47.42 C10.2 | 26.67,48.26 C12.1 | 19.05,47.42 19.05,57.78 | 26.67,48.26 5V_REG.P$2 | SBRIO_AUX.P$17 SBRIO_AUX.P$15 SBRIO_AUX.P$13 SBRIO_AUX.P$11 SBRIO_AUX.P$9 SBRIO_AUX.P$7 | 3.3V_REG.7 16.33,42.16 | 16.33,42.16 3.3V_REG.9 | 16.33,42.16 16.33,36.8 SBRIO_AUX.P$48 | SBRIO_AUX.P$32 32.33,36.8 30.38,36.8 SBRIO_AUX.P$34 | SBRIO_AUX.P$26 36.37,36.8 SBRIO_AUX.P$28
IMD_OK
  Bottom 0.152: F7.2 21.31,11.18 20.57,11.18 D5.P$1
IMD_OUT
  Bottom 0.152: Q3.P$1 92.71,47.62 F13.2
N$1
  Bottom 0.152: D2.P$1 70.1,38.1 68.81,36.8 SBRIO_AUX.P$2
N$2  (via drill 0.38)
  Top 0.152: v56.92,50.32 57.99,49.25 v57.99,39.17
  Bottom 0.152: v56.92,50.32 49.43,50.32 43.36,56.39 38.89,56.39 38.63,56.64 D1.P$1 | SBRIO_AUX.P$4 v57.99,39.17
N$3
  Top 0.152: WHEEL_SPEED.P$1 99.44,68.3 R32.1
N$4  (via drill 0.38)
  Top 0.152: v8.87,51.99 13.41,47.45 13.41,34.42 v25.91,21.92 | SBRIO_ANALOG.P$2 62.36,20.34 64.26,20.34 R13.2
  Bottom 0.152: v8.87,51.99 D3.P$2 | v25.91,21.92 60.98,21.92 SBRIO_ANALOG.P$2
N$5
  Bottom 0.152: R21.2 87.66,54.3 89.15,54.3 Q6.P$2
N$6
  Top 0.152: R30.2 97.66,66.37 96.01,66.37 Q16.P$2
N$7
  Bottom 0.152: F1.1 17.27,64.39 17.37,64.49 Q1.P$1
N$8
  Bottom 0.152: F2.1 12.19,64.39 12.29,64.49 Q2.P$1
N$9
  Top 0.152: WHEEL_SPEED.P$3 99.44,64.26 97.66,64.26 R28.1
N$10
  Top 0.152: R26.1 97.66,70.97 98.42,70.21 WHEEL_SPEED.P$8
N$11  (via drill 0.38)
  Top 0.152: U$3.189 73.28,54 v71.93,54 | v25.5,60.71 v28.19,58.01
  Bottom 0.152: v71.93,54 70.36,52.43 69.14,52.43 66.42,49.71 36.5,49.71 v28.19,58.01 | v25.5,60.71 24.26,60.71 R24.1
N$12  (via drill 0.38)
  Top 0.152: U$3.177 74.57,51.44 75.79,51.44 75.79,49.3 75.44,48.95 v73.23,48.95 | v26.11,59.23 v27.33,58.01
  Bottom 0.152: v73.23,48.95 72.69,49.48 68.83,49.48 68.68,49.33 36.02,49.33 v27.33,58.01 | v26.11,59.23 25.27,60.07 19.81,60.07 19.18,60.71 R25.1
N$13  (via drill 0.38)
  Top 0.152: v25.76,5.11 25.35,4.7 HV_BOX_CONN.P$7
  Bottom 0.152: v25.76,5.11 25.76,10.41 F8.1
N$14  (via drill 0.38)
  Top 0.152: v23.37,5.11 23.34,5.08 HV_BOX_CONN.P$8
  Bottom 0.152: v23.37,5.11 23.37,10.41 F7.1
N$15  (via drill 0.38)
  Top 0.152: U$3.192 68.56,53.09 v68.56,52.7 | v65.48,50.32 65.66,50.14 65.66,27.18 59.31,20.83 59.31,17.27 v58.98,16.94
  Bottom 0.152: v68.56,52.7 66.17,50.32 v65.48,50.32 | v58.98,16.94 56.31,14.28 31.88,14.28 30.05,12.45 20.37,12.45 19.63,13.18 D5.P$2 19.66,13.26 19.68,13.26 19.68,15.24 R8.2
N$16  (via drill 0.38)
  Top 0.152: v67.08,52.09 U$3.180 | v48.51,52.09 37.31,40.89 37.31,33.66 36.78,33.12 36.78,21.46 37.31,20.93 v37.31,17.83
  Bottom 0.152: v67.08,52.09 66.62,51.64 48.97,51.64 v48.51,52.09 | v37.31,17.83 34.72,15.24 R9.1 27.64,15.21 27.64,13.21 D6.P$2
N$17  (via drill 0.38)
  Top 0.152: v74.57,50.16 U$3.171 | v78.11,47.02 80.85,44.27 v80.85,39.83 80.57,39.55 80.57,32.16 v80.92,31.8 80.97,31.75 v80.97,24.13
  Bottom 0.152: THERMO_4.7 82.47,15.88 81.79,16.56 81.25,16.56 81.1,16.71 81.1,21.64 83.72,21.64 83.9,21.82 83.9,23.5 THERMO_3.7 82.42,23.52 81.81,24.13 v80.97,24.13 | v74.57,50.16 77.72,47.02 v78.11,47.02 | v80.85,39.83 81.94,38.73 THERMO_1.7 | v80.92,31.8 81.79,31.8 82.47,31.11 THERMO_2.7
N$18  (via drill 0.38)
  Top 0.152: U$3.159 73.25,47.62 72.03,47.62 v72.03,43.89 | v79.96,36.4 v79.96,30.56
  Bottom 0.152: 83.9,20.95 83.9,14.2 83.72,14.02 83.19,14.02 THERMO_4.5 | THERMO_3.5 83.9,20.95 | 83.9,20.95 83.95,21.01 84.28,21.01 84.28,26.8 THERMO_2.5 82.42,28.6 81.76,29.26 81.25,29.26 v79.96,30.56 | v72.03,43.89 70.13,41.99 70.13,38.79 70.69,38.79 71.37,38.1 71.37,36.45 79.96,36.45 | 79.96,36.45 82.22,36.45 82.47,36.2 THERMO_1.5 | v79.96,36.4 79.96,36.45
N$20
  Top 0.152: F16.2 70.48,3.79 70.46,3.76 SHOCK_POT_CONN.P$4
N$21
  Bottom 0.152: F15.1 90.19,62.2 WHEEL_SPEED.P$4
N$22
  Top 0.152: F9.1 PEDAL_CONN.P$5
N$23
  Top 0.152: DASHBOARD_CONN.P$4 99.44,31.17 98.09,31.17 97.74,31.52 97.74,32.33 91.08,38.99 F10.1
N$24
  Bottom 0.152: F11.1 98.02,48.64 DASHBOARD_CONN.P$5
N$25  (via drill 0.38)
  Top 0.152: U$3.153 73.25,46.35 v73.25,43.87
  Bottom 0.152: v73.25,43.87 72.57,43.18 71.83,43.18 71.48,42.82 71.48,39.75 72.67,39.75 74.95,37.47 THERMO_1.6
N$26  (via drill 0.38)
  Top 0.152: U$3.141 74.57,43.81 74.57,41.68 74.98,41.27 75.84,41.27 75.84,40.41 76.25,40.01 79.35,40.01 v79.35,32.41
  Bottom 0.152: v79.35,32.41 81.92,29.84 THERMO_2.6
N$27  (via drill 0.38)
  Top 0.152: U$3.135 73.25,42.55 73.25,41.68 72.85,41.27 72.03,41.27 v72.03,31.19
  Bottom 0.152: v72.03,31.19 81,22.23 THERMO_3.6
N$28  (via drill 0.38)
  Top 0.152: U$3.123 74.57,40.01 75.74,40.01 75.74,39.7 75.84,39.6 v75.84,19.76
  Bottom 0.152: v75.84,19.76 81,14.61 THERMO_4.6
N$29  (via drill 0.38)
  Top 0.152: v90.12,36.8 99.44,27.48 THERM_CONN.P$5
  Bottom 0.152: v90.12,36.8 88.37,36.8 87.71,37.47 THERMO_1.3
N$30  (via drill 0.38)
  Top 0.152: v90.12,29.18 98.4,20.9 98.4,20.14 99.44,19.1 THERM_CONN.P$6
  Bottom 0.152: v90.12,29.18 88.37,29.18 87.71,29.84 THERMO_2.3
N$31
  Bottom 0.152: THERMO_3.3 87,21.54 86.46,21.54 86.28,21.36 86.28,17.73 98.81,17.73 99.44,17.09 THERM_CONN.P$7
N$32
  Bottom 0.152: THERMO_4.3 87,15.29 86.46,15.29 86.28,15.47 86.28,16.46 98.07,16.46 THERM_CONN.P$8
N$33
  Bottom 0.152: F12.1 96.19,46.66 99.44,46.66 DASHBOARD_CONN.P$6
N$34
  Bottom 0.152: F13.1 94.39,44.65 99.44,44.65 DASHBOARD_CONN.P$7
N$35
  Bottom 0.152: F14.1 92.71,42.55 92.79,42.62 99.44,42.62 DASHBOARD_CONN.P$8
N$36
  Top 0.152: SHTDWN_CONN.7 27.2,74.68 29.67,72.21 29.67,69.7 SHTDWN_CONN.8
  Bottom 0.152: F.2 27.3,65.68 29.67,68.05 29.67,69.67 SHTDWN_CONN.8
N$37  (via drill 0.38)
  Top 0.152: v69.34,73.41 69.11,73.18 69.11,71.83 U3.14
  Bottom 0.152: v69.34,73.41 69.95,74.02 69.95,75.31 C14.2 69.57,75.36 C13.2
N$38
  Bottom 0.152: C13.1 66.37,76.71 66.29,76.78 R35.2
N$39
  Top 0.152: SHTDWN_CONN.3 19.68,72.19 19.68,69.7 SHTDWN_CONN.4
  Bottom 0.152: F1.2 17.27,65.68 19.68,68.1 SHTDWN_CONN.4
N$40
  Top 0.152: SHTDWN_CONN.1 14.68,72.19 14.68,69.7 SHTDWN_CONN.2
  Bottom 0.152: F2.2 12.19,65.68 14.68,68.17 SHTDWN_CONN.2
N$41
  Top 0.152: BSPD_CONN.9 61.54,74.68 64.01,72.21 64.01,69.7 BSPD_CONN.10
  Bottom 0.152: F6.1 64.03,65.28 BSPD_CONN.10
N$42
  Top 0.152: BSPD_CONN.1 44.02,72.19 44.02,69.7 BSPD_CONN.2
  Bottom 0.152: D4.P$1 44.07,69.67 44.04,69.67 BSPD_CONN.2
N$43
  Top 0.152: F5.1 59.05,65.81 59.03,65.84 BSPD_CONN.8 59,69.75 59,72.21 BSPD_CONN.7
N$44
  Bottom 0.152: F.1 27.3,64.39 27.41,64.49 U1.P$1
N$45
  Bottom 0.152: F6.2 60.05,65.28 Q10.P$1
N$46
  Bottom 0.152: R23.2 30.61,62.48 30.66,62.48 U1.P$2
N$47
  Bottom 0.152: R2.2 20.7,62.48 20.65,62.48 Q1.P$2
N$48
  Bottom 0.152: R3.2 15.62,62.48 Q2.P$2
N$49
  Bottom 0.152: R22.2 61.39,63.88 60.91,63.4 Q10.P$2
N$50
  Bottom 0.152: R5.2 87.66,50.49 89.15,50.49 Q5.P$2
N$51
  Bottom 0.152: R19.2 87.66,46.69 89.15,46.69 Q3.P$2
N$52
  Top 0.152: F4.1 53.98,65.81 54.03,65.86 BSPD_CONN.6 54,69.75 54,72.21 BSPD_CONN.5
N$53
  Top 0.152: F3.1 BSPD_CONN.4 49.02,69.75 49.02,72.19 BSPD_CONN.3
N$54
  Bottom 0.152: R11.2 66.93,27.94 66.88,27.94 Q7.P$2
N$55  (via drill 0.38)
  Top 0.152: v61.87,31.85 62.36,32.33 SBRIO_AUX.P$1
  Bottom 0.152: v61.87,31.85 62.41,31.85 62.87,31.39 F17.1
N$56
  Bottom 0.152: F17.2 62.97,29.97 65.91,29.97 Q7.P$1
N$57
  Top 0.152: Q8.P$1 63.37,40.11 63.27,40.01 F18.2
N$58
  Top 0.152: R12.2 64.39,44.63 64.34,44.58 Q8.P$2
N$59
  Top 0.152: F18.1 58.75,36.8 SBRIO_AUX.P$6
N$60
  Top 0.152: R15.2 66.93,47.93 U$15.P$2
N$61
  Top 0.152: R12.1 64.39,47.52 64.9,48.03 64.9,48.9 U$15.P$1
N$62
  Bottom 0.152: U$16.P$2 63.12,24.08 61.32,25.88 R16.2
N$63
  Bottom 0.152: U$16.P$1 66.93,25.02 R11.1
N$64
  Bottom 0.152: U$17.P$1 87.63,51.82 R5.1
N$65
  Bottom 0.152: R18.2 82.7,50.8 82.75,50.85 84.07,50.85 U$17.P$2
N$66
  Bottom 0.152: U$18.P$1 87.63,48.01 R19.1
N$67
  Bottom 0.152: R6.1 82.7,46.99 82.75,47.04 84.07,47.04 U$18.P$2
N$68
  Bottom 0.152: R20.2 87.66,42.88 89.15,42.88 Q4.P$2
N$69
  Bottom 0.152: U$19.P$1 87.63,44.2 R20.1
N$70
  Bottom 0.152: R7.1 82.7,43.18 82.75,43.23 84.07,43.23 U$19.P$2
N$71
  Bottom 0.152: U$20.P$1 87.63,55.63 R21.1
N$72
  Bottom 0.152: R10.1 82.7,54.61 82.75,54.66 84.07,54.66 U$20.P$2
N$73
  Bottom 0.152: Q9.P$1 63.88,63.88 R22.1
N$74
  Bottom 0.152: Q9.P$2 64.85,60.45 64.85,59.33 64.9,59.33 R4.2
N$75
  Bottom 0.152: Q13.P$1 30.61,59.56 R23.1
N$76
  Bottom 0.152: R1.2 34.47,60.58 34.42,60.53 Q13.P$2
N$77
  Bottom 0.152: U$23.P$1 22.48,59.05 22.12,59.41 R2.1
N$78
  Bottom 0.152: Q11.P$1 17.4,59.05 16.79,59.66 15.62,59.66 R3.1
N$79  (via drill 0.38)
  Top 0.152: v24.41,58.01 25.25,58.85 v25.25,59.23
  Bottom 0.152: v24.41,58.01 23.44,57.05 U$23.P$2 | v25.25,59.23 25.07,59.41 R24.2
N$80
  Bottom 0.152: Q11.P$2 18.34,57.02 17.6,56.29 15.95,56.29 15.75,56.49 15.75,58.29 18.06,58.29 R25.2
N$81
  Top 0.152: R26.2 97.66,75.62 94.77,75.62 94.41,75.26 94.41,74.75 94.74,74.42 94.74,74.22 95.99,72.97 Q14.P$2
N$82
  Top 0.152: R28.2 97.66,63.04 96.01,63.04 Q15.P$2
N$83
  Top 0.152: WHEEL_SPEED.P$2 99.44,65.66 97.66,65.66 R30.1
N$84
  Top 0.152: R32.2 97.66,69.65 96.01,69.65 Q17.P$2
SHIELD
  Top 0.152: U$2.P$5 3.53,17.25 3.53,14.71 U$2.P$10
  Bottom 0.152: U$2.P$10 14.63,1.12 18.29,1.12 HV_BOX_CONN.P$2
STEERING_POS  (via drill 0.38)
  Top 0.152: v30.73,28.42 SBRIO_AUX.P$39 | v39.7,22.53 41.4,20.83 41.4,19.48 42.34,18.54 SBRIO_ANALOG.P$21 42.39,18.49 42.39,4.65 44.88,2.16 PEDAL_CONN.P$3
  Bottom 0.152: v30.73,28.42 36.63,22.53 v39.7,22.53
THROTTLE_1
  Top 0.152: PEDAL_CONN.P$1 45.41,5.64 45.41,19.58 46.35,20.52 SBRIO_ANALOG.P$18
THROTTLE_2
  Top 0.152: SBRIO_ANALOG.P$20 44.35,20.52 43.41,19.58 43.41,5.64 46.89,2.16 PEDAL_CONN.P$2

## Text on the board
bPlace: Layout By: Kendall Searing | Formula Electric 2014: sbRIO Daughter Card v4 | Design By: Thomas Willson